# EAGLE board source_eagle (EAGLE 9.6.2)
REV: B
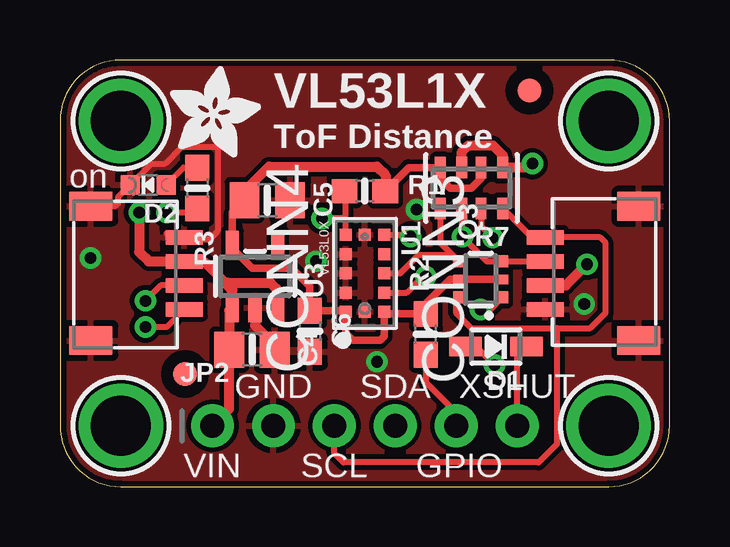
[diagram p0: board, top side]
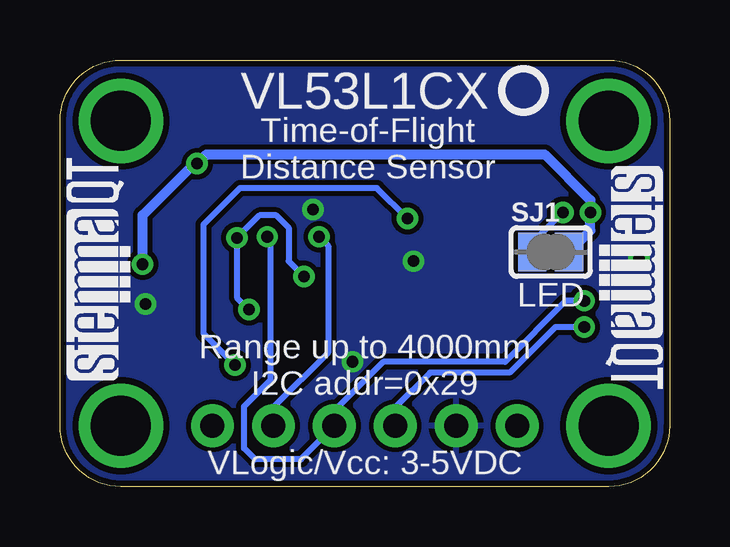
[diagram p1: board, bottom side, seen from below]

Size 25.4 x 17.78 mm. Coordinates in mm from the lower left corner, seen from the top.
Outline: 0,15.24 0,2.54 arc90 2.54,0 22.86,0 arc90 25.4,2.54 25.4,15.24 arc90 22.86,17.78 2.54,17.78 arc90 0,15.24
Copper layers (1*16): Top 0.035mm / dielectric 1.5mm / Bottom 0.035mm
Design rules "adafruit *": minimum track width 8mil, minimum drill 15.5mil, track to track 8mil, track to pad 8mil, pad to pad 8mil, via to via 8mil, smd to smd 8mil, copper to edge 10mil, drill to drill 8mil, minimum pad ring 10mil, minimum via ring 8mil, stop-mask expansion 2mil, vias tented up to drill 20mil, thermal gap 10mil
Net classes: 1 highpower: width 0.406 mm, drill 0.483 mm; 2 lowpower: width 0.305 mm, drill 0.483 mm

## Footprints (pad centres in the part's own frame; a part is rotated, then mirrored left to right if it is on the bottom)
0805-NO = smd 1.24 x 1.5: 1 -0.95,0; 2 0.95,0
0603-NO = smd 1.075 x 1: 1 -0.85,0; 2 0.85,0
JST_SH4 = smd 0.6 x 1.55: 1 -1.5,2.514; 2 -0.5,2.514; 3 0.5,2.514; 4 1.5,2.514 | smd 1.2 x 1.8: MT1 -2.8,-1.386; MT2 2.8,-1.386
SOD-323 = smd 1.35 x 0.8: A 1.27,0; C -1.27,0
CHIPLED_0603_NOOUTLINE = smd 0.8 x 0.8: A 0,-0.75; C 0,0.75
FIDUCIAL_1MM = smd 1 x 1: 1 0,0
1X06_ROUND_70 = drill 1 pad 1.778: 1 -6.35,0; 2 -3.81,0; 3 -1.27,0; 4 1.27,0; 5 3.81,0; 6 6.35,0
SOT363 = smd 0.5 x 0.5: 1 -0.75,-0.9; 3 0.75,-0.9; 4 0.75,0.9; 6 -0.75,0.9 | smd 0.4 x 0.5: 2 0,-0.9; 5 0,0.9
RESPACK_4X0603 = smd 0.45 x 0.9: 1 -1.3,-0.85; 2 -0.4,-0.85; 3 0.4,-0.85; 4 1.3,-0.85; 5 1.3,0.85; 6 0.4,0.85; 7 -0.4,0.85; 8 -1.3,0.85
SOLDERJUMPER_CLOSEDWIRE = smd 1.168 x 1.6: 1 -0.762,0; 2 0.762,0 | smd 0.635 x 0.203: WIRE 0,0
LGA12_ST = smd 0.5 x 0.5: 1 1.6,-0.8; 2 0.8,-0.8; 3 0,-0.8; 4 -0.8,-0.8; 5 -1.6,-0.8; 6 -1.6,0; 7 -1.6,0.8; 8 -0.8,0.8; 9 0,0.8; 10 0.8,0.8; 11 1.6,0.8; 12 1.6,0
SOT23-5 = smd 0.55 x 1.2: 1 -0.95,-1.3; 2 0,-1.3; 3 0.95,-1.3; 4 0.95,1.3; 5 -0.95,1.3
MOUNTINGHOLE_2.5_PLATED = drill 2.5 pad 3.2: P$1 0,0

## Placement (x,y rotation side)
C4  10uF  [0805-NO]  8,5.71 0 top
C5  10uF  [0805-NO]  8.64,11.94 0 top
C6  0.1uF  [0603-NO]  10.41,6.48 270 top
CONN3  STEMMA_I2C_QT  [JST_SH4]  22.73,8.89 90 top
CONN4  STEMMA_I2C_QT  [JST_SH4]  2.67,8.89 270 top
D1  1N4148  [SOD-323]  18.16,5.84 180 top
D2  GREEN  [CHIPLED_0603_NOOUTLINE]  3.68,12.57 90 top
FID1  FIDUCIAL_1MM  [FIDUCIAL_1MM]  5.21,4.7 0 top
FID4  FIDUCIAL_1MM  [FIDUCIAL_1MM]  19.56,16.51 0 top
JP2  [1X06_ROUND_70]  12.7,2.54 0 top
Q3  BSS138  [SOT363]  17.53,8.64 90 top
R1  10K  [0603-NO]  12.7,12.32 0 top
R2  10K  [0603-NO]  15.24,6.35 90 top
R3  10K  [0603-NO]  5.71,12.45 270 top
R7  10K  [RESPACK_4X0603]  17.14,12.45 180 top
SJ1  [SOLDERJUMPER_CLOSEDWIRE]  4.95,9.78 0 bottom
U1  VL53L0X  [LGA12_ST]  12.7,8.89 270 top
U3  LP5907-2.8  [SOT23-5]  8.13,8.76 0 top
U$30  MOUNTINGHOLE2.5  [MOUNTINGHOLE_2.5_PLATED]  2.54,15.24 0 top
U$31  MOUNTINGHOLE2.5  [MOUNTINGHOLE_2.5_PLATED]  22.86,15.24 0 top
U$33  MOUNTINGHOLE2.5  [MOUNTINGHOLE_2.5_PLATED]  2.54,2.54 0 top
U$34  MOUNTINGHOLE2.5  [MOUNTINGHOLE_2.5_PLATED]  22.86,2.54 0 top
U$36  [ADAFRUIT_3.5MM]  4.57,13.72 0 top
U$37  [PCBFEAT-REV-040]  6.1,16.51 0 bottom
U$38  [STEMMAQT]  22.48,4.45 90 bottom
U$39  [STEMMAQT]  2.92,13.34 270 bottom

## Library data of the parts
C4-C6 CONN3 CONN4 D1 D2 JP2 Q3 R1-R3 R7 SJ1 U1 U3 U$36 U$37 = microbuilder
FID1 FID4 U$30 U$31 U$33 U$34 = microbuilder; BOM: EXCLUDE
U$38 U$39 = silks

## Nets
2.8V: C5.1 C6.1 Q3.2 Q3.5 R1.2 R2.2 R7.2 R7.4 U1.1 U1.11 U3.5
GND: C4.2 C5.2 C6.2 CONN3.1 CONN3.MT1 CONN3.MT2 CONN4.1 CONN4.MT1 CONN4.MT2 D2.C JP2.2 U1.2 U1.3 U1.4 U1.6 U1.12 U3.2
GPIO: JP2.5 R2.1 U1.7
N$1: D2.A R3.1
N$2: R3.2 SJ1.1
SCL: CONN3.4 CONN4.4 JP2.3 Q3.6 R7.8
SCL_3V: Q3.1 R7.7 U1.10
SDA: CONN3.3 CONN4.3 JP2.4 Q3.3 R7.6
SDA_3V: Q3.4 R7.5 U1.9
VCC [highpower]: C4.1 CONN3.2 CONN4.2 JP2.1 R7.1 R7.3 SJ1.2 U3.1 U3.3
XSHUT: D1.C JP2.6
XSHUT_2.8V: D1.A R1.1 U1.5

## Tracks (layer width: path | path; a pad name or v marks a point on that pad's centre or on a via)
2.8V
  Top 0.305: C5.1 7.18,11.43 U3.5 7.18,9.94 8.01,9.11 9.65,9.11 10.41,8.35 C6.1 11.86,7.33 U1.1 11.9,6.39 12.19,6.1 13.34,6.1 13.5,6.26 U1.11 13.59,7.2 15.11,7.2 | 15.11,7.2 R2.2 | Q3.2 Q3.5 16.26,8.64 15.11,7.49 15.11,7.2 | R7.2 17.55,12.85 17.14,12.45 16.26,12.45 15.85,12.86 R7.4 14.53,13.3 13.57,12.34 R1.2
  Top 0.406: C5.1 7.69,12.32 8.7,13.34 13.21,13.34 13.57,12.97 13.57,12.34
GND  (via drill 0.48)
  Top 0.254: CONN4.1 5.03,10.54 4.45,10.54 4.7,10.29 6.22,10.29 6.57,10.64 6.57,14.16 5.08,14.16 4.38,13.46 3.82,13.46 D2.C 2.41,12.05 2.41,11.81 2.29,11.69 CONN4.MT1
  Top 0.406: U3.2 8.13,6.71 8.95,5.89 C4.2
  other vias: 13.21,5.21 10.67,9.4 1.27,9.53 21.84,7.62 14.86,11.56
  pour Top: 0,17.78 25.4,17.78 25.4,0 0,0
  pour Bottom: 0,17.78 25.4,17.78 25.4,0 0,0
GPIO  (via drill 0.48)
  Top 0.254: R2.1 15.24,4.36 16.51,3.09 JP2.5 | U1.7 14.53,10.49 v14.61,10.41
  Bottom 0.254: v14.61,10.41 14.22,10.03 14.22,5.59 16.51,3.3 JP2.5
N$1
  Top 0.254: D2.A 5.16,13.3 R3.1
N$2  (via drill 0.48)
  Top 0.254: v4.45,11.43 5.55,11.43 R3.2
  Bottom 0.254: SJ1.1 5.71,10.16 v4.45,11.43
SCL  (via drill 0.48)
  Top 0.254: CONN4.4 4.45,6.66 v3.56,6.66 | R7.8 19.65,10.39 CONN3.4 22.5,10.39 22.73,10.16 22.73,7.24 22.1,6.6 20.7,6.6 | Q3.6 16.5,7.76 16.5,7.25 17.14,6.6 20.7,6.6 | 20.7,6.6 20.7,1.78 19.94,1.02 11.81,1.02 11.43,1.4 JP2.3
  Bottom 0.254: v3.56,6.66 4.76,6.66 6.67,4.75 9.98,4.75 11.43,3.3 JP2.3
SCL_3V  (via drill 0.48)
  Top 0.254: R7.7 17.55,10.86 v18.03,10.37 | v17.53,7.38 17.92,7.38 Q3.1 | U1.10 14.44,8.09 15.11,8.76 v15.24,8.76
  Bottom 0.254: v17.53,7.38 18.03,7.88 v18.03,10.37 17.1,11.3 16.38,11.3 15.88,10.79 15.88,9.4 v15.24,8.76
SDA  (via drill 0.48)
  Top 0.254: CONN4.3 4.2,8.39 v3.56,7.75 | Q3.3 | Q3.3 CONN3.3 | R7.6 16.75,10.43 v16.76,10.41 17.79,9.39 Q3.3
  Bottom 0.254: v3.56,7.75 4.32,7.75 6.86,5.21 11.94,5.21 13.97,3.17 JP2.4 15.37,1.14 17.27,1.14 17.73,1.6 17.73,3.35 16.64,4.45 16.64,10.03 16.76,10.16 v16.76,10.41
SDA_3V
  Top 0.254: R7.5 15.85,10.17 16.35,9.66 | 16.35,9.66 Q3.4 | U1.9 14.18,8.89 14.95,9.66 16.35,9.66
VCC  (via drill 0.48)
  Top 0.406: JP2.1 7.05,3.24 C4.1 7.05,7.34 U3.1 7.18,8.19 6.92,8.45 | 6.92,8.45 6.99,8.51 8.76,8.51 9.02,8.26 9.02,7.52 U3.3 | 6.92,8.45 5.98,9.39 CONN4.2 3.69,9.39 3.3,9.78 v3.3,11.43 | R7.3 16.75,13.95 17.02,14.22 18.03,14.22 18.45,13.81 R7.1 19.52,13.3 v19.68,13.46 | CONN3.2 21.08,8.39 v21.96,9.27
  Bottom 0.406: v21.96,9.27 21.96,11.32 19.81,13.46 v19.68,13.46 19.3,13.84 5.21,13.84 3.3,11.94 v3.3,11.43 3.3,10.67 SJ1.2
XSHUT
  Top 0.254: JP2.6 19.05,5.46 D1.C
XSHUT_2.8V  (via drill 0.48)
  Top 0.254: U1.5 11.9,11.3 | 11.9,11.3 11.9,12.27 R1.1 | 11.9,11.3 11.77,11.18 v10.92,11.18 | v18.11,5.07 17.33,5.84 D1.A
  Bottom 0.254: v10.92,11.18 12.19,12.45 17.91,12.45 19.43,10.92 19.43,6.39 v18.11,5.07

## Text on the board
tPlace: VL53L1X | ToF Distance | on | GND | SDA | XSHUT | VIN | SCL | GPIO
bPlace: VL53L1CX | Time-of-Flight / Distance Sensor | LED | Range up to 4000mm / I2C addr=0x29 | VLogic/Vcc: 3-5VDC